# Altium PCB USB-COM V2.PcbDoc
Units mil, origin at the board's own origin, x right, y up, seen from the top; angles counter-clockwise.
Board outline 2345 x 615 mil, 2 copper layers (Top Layer, Bottom Layer); 17 components, 16 nets, 78 pads, 6 vias.
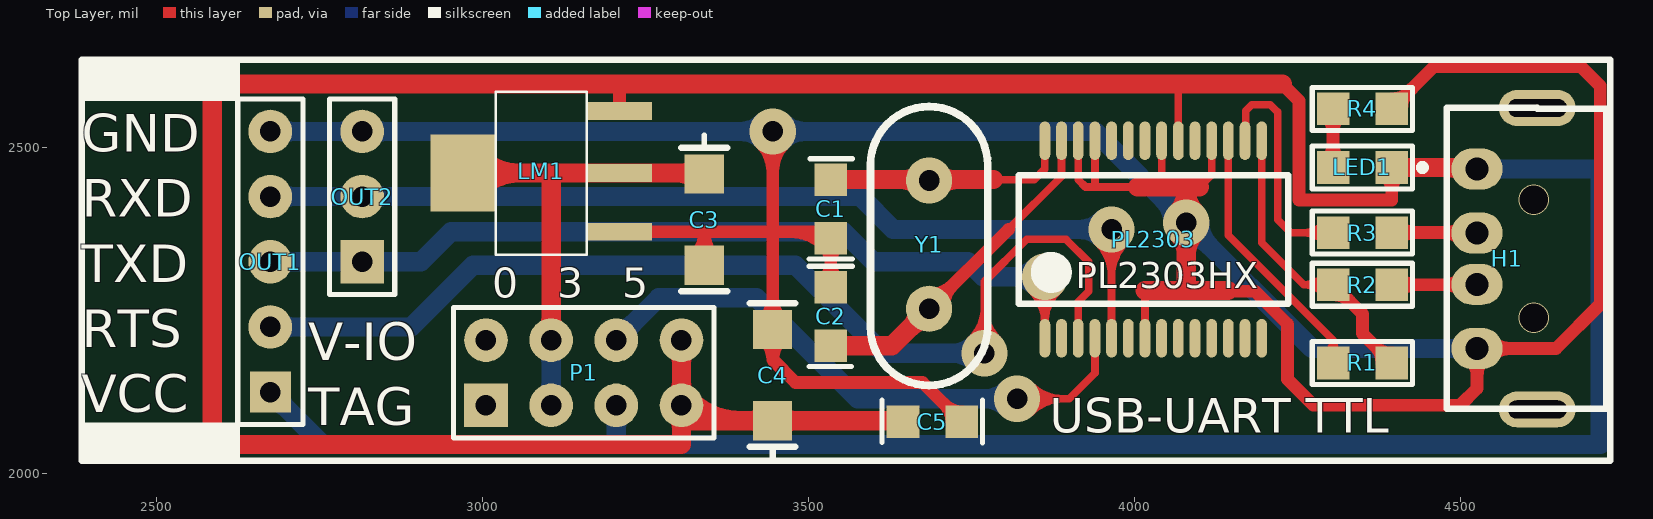
[diagram p0: Top Layer view]
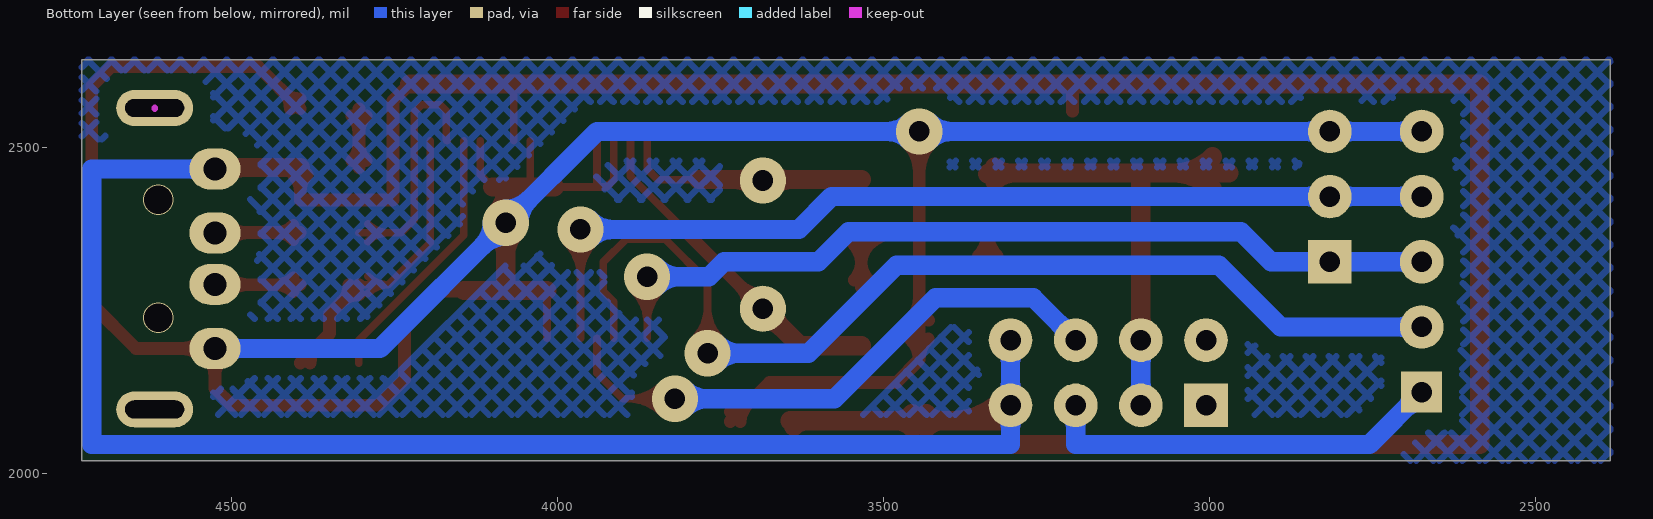
[diagram p1: Bottom Layer view, seen from below]
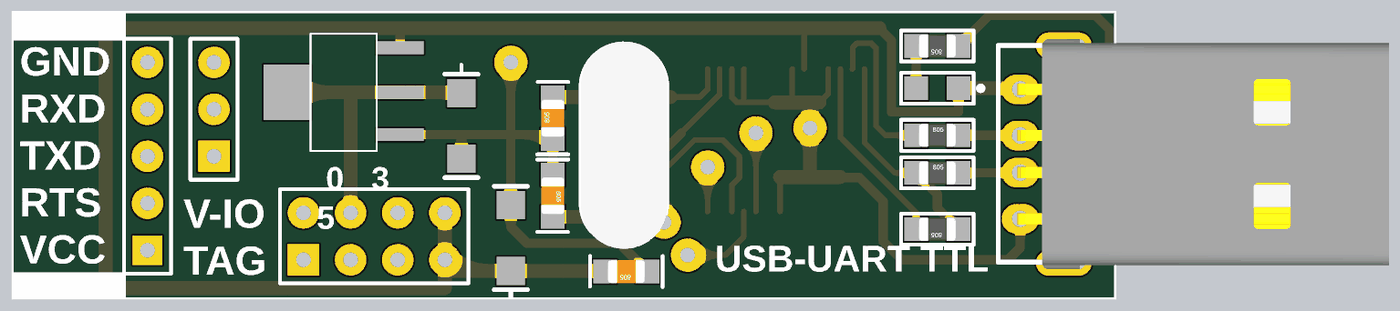
[diagram p2: 3D render of the assembled board from above, using the file's embedded part models]

## Layer stack, top to bottom
Top Layer: signal copper 1.4
Dielectric: dielectric 12.6, FR-4, Dk 4.8
Bottom Layer: signal copper 1.4

## Board outline
2385,2020 2385,2635 4730,2635 4730,2020

## Design rules (kind name [scope] priority, off if disabled: settings)
Clearance Poly [(InPolygon)] p1: gap=25.59
Clearance [All] p2: gap=5
Height [All] p1: minheight=0 maxheight=3000 prefheight=500
PlaneConnect [All] p1: planeconnectstyle=Relief reliefexpansion=20 reliefentries=4 reliefconductorwidth=23.62 reliefairgap=10
PolygonConnect [All] p1: connectstyle=Relief reliefconductorwidth=23.62 reliefentries=4 polygonreliefangle="90 Angle"
RoomDefinition USB-COM [InComponentClass('USB-COM')] p1: confinementstyle=ConfineOut formatcopy=TRUE lockcomponents=FALSE outline 5105,4120 8760,4120 8760,7965 5105,7965
RoutingVias [All] p1: holewidth=31.5 width=70.87 viastyle="Through Hole" minholewidth=28 minwidth=47.24 maxholewidth=125.98 maxwidth=157.48
SilkscreenOverComponentPads [All] p1: minsilkscreentomaskgap=10
SolderMaskExpansion [All] p1: expansion=4
Width [All] p1: maxlimit=78.74 minlimit=11.81 preferedwidth=29.53
25 further rules are at their usual default settings.

## Components (designator, comment, footprint, x,y, rotation, side; value= is the part's Value field where it differs from the comment)
C1 "Capacitor Ceramic" C0805 3534.04,2406.37 r90 top
C2 "Capacitor Ceramic" C0805 3534.04,2241.37 r270 top
C3 "10uF" C1206 3340,2390 r90 top
C4 "10uF" C1206 3444.97,2151.39 r270 top
C5 "Capacitor Ceramic" C0805 3690,2080 r180 top
H1 "USB - A/RA" USB-A-RA 4529.07,2329.99 r90 top
LED1 "LED3" LED0805 4350,2470 r180 top
LM1 "LM1117-3.3V" LM1117-SOP 3159.97,2461.39 r90 top
OUT1 "Header 5" HDR1X5 2674,2125.31 r90 top
OUT2 "Header 3" HDR1X3 2815,2325.31 r90 top
P1 "Header 4X2A" HDR2X4_CEN 3005,2105 r0 top
PL2303 "PL2303HX" PL2303-HX 3113.39,1294.41 r0 top (schematic designator PL1)
R1 "RES_08" "DIEN TRO 0805" 4350,2170 r0 top
R2 "RES_08" "DIEN TRO 0805" 4350,2290 r180 top
R3 "RES_08" "DIEN TRO 0805" 4350,2370 r180 top
R4 "RES_08" "DIEN TRO 0805" 4350,2560 r0 top
Y1 "20MHz" XTAL 3684.97,2349.54 r270 top

## Footprints (in the part's own frame and the unit in brackets; to place one, negate y for a bottom-side part, rotate by r counter-clockwise, add the part's x,y. Pads: shape width x height; smd on the part's side, far side on the other; paste and mask are expansions set on the pad)
C0805 [mil] "Chip Resistor; Body 2.0 x 1.3 mm (LxW typ)"
  rect 50x50 smd: 1(-45,0) 2(45,0)
  silkscreen extent -77,-33 77,33, body extent -39,-25 39,25, height 31
C1206 [mil]
  rect 60x60 smd: 1(-70,0) 2(70,0)
  silkscreen extent -110,-35 110,35
"DIEN TRO 0805" [mil] "Chip Resistor; Body 2.0 x 1.3 mm (LxW typ)"
  rect 50x50 smd: 1(-45,0) 2(45,0)
  silkscreen extent -77,-33 77,33, body extent -39,-25 39,25, height 31
HDR1X3 [mm] "Connector; Header; 3 Position"
  rect 1.7x1.7 hole 0.8: 1(0,0)
  round 1.7 hole 0.8: 2(2.54,0) 3(5.08,0)
  silkscreen extent -1.27,-1.27 6.35,1.27, body extent -1.27,-1.27 6.35,1.27, height 7
HDR1X5 [mm] "Connector; Header; 5 Position"
  rect 1.6x1.6 hole 0.8: 1(0,0)
  round 1.7 hole 0.8: 2(2.54,0) 3(5.08,0) 4(7.62,0) 5(10.16,0)
  silkscreen extent -1.27,-1.27 11.43,1.27, body extent -1.27,-1.27 11.43,1.27, height 7
HDR2X4_CEN [mm] "Connector; Header; 4x2 Position"
  rect 1.7x1.7 hole 0.8: 1(0,0)
  round 1.7 hole 0.8: 2(2.54,0) 3(5.08,0) 4(7.62,0) 5(0,2.54) 6(2.54,2.54) 7(5.08,2.54) 8(7.62,2.54)
  silkscreen extent -1.27,-1.27 8.89,3.81
LED0805 [mil] "Chip Resistor; Body 2.0 x 1.3 mm (LxW typ)"
  rect 50x50 smd: 1(-45,0) 2(45,0)
  silkscreen extent -97,-33 77,33, body extent -60,-25 60,25, height 47
LM1117-SOP [mm]
  rect 0.7x2.54 smd: 1(-2.286,-1.27) 2(0,-1.27) 3(2.413,-1.27)
  rect 3x2.54 smd: 2(0,4.826)
  silkscreen extent -3.18,0 3.17,3.56
PL2303-HX [mil]
  oval 16.53x59.03 smd mask+7.9: 1(749.3,913.5) 2(774.9,913.5) 3(800.48,913.5) 4(826.08,913.5) 5(851.67,913.5) 6(877.27,913.5) 7(902.87,913.5) 8(928.45,913.5) 9(954.05,913.5) 10(979.65,913.5) 11(1005.23,913.5) 12(1030.83,913.5) 13(1056.42,913.5) 14(1082,913.5) 15(1082,1216.68) 16(1056.42,1216.68) 17(1030.83,1216.68) 18(1005.23,1216.68) 19(979.65,1216.68) 20(954.05,1216.68) 21(928.45,1216.68) 22(902.87,1216.68) 23(877.27,1216.68) 24(851.67,1216.68) 25(826.08,1216.68) 26(800.48,1216.68) 27(774.9,1216.68) 28(749.3,1216.68)
  silkscreen extent 709,967 1123,1164
USB-A-RA [mm] "USB Type A"
  oval 1.6x2 hole 0.9: 1(3.5,0.08) 2(1,0.08) 3(-1,0.08) 4(-3.5,0.08)
  oval 1.4x3 hole 0.7 slot 2.3 at 90 deg: HOLE(-5.875,-2.27) HOLE(5.875,-2.27)
  round 1.2 hole 1.1: HOLE(-2.3,-2.13) HOLE(2.3,-2.13)
  Keep-Out Layer lines w0.254: 5.842,-2.27 5.875,-2.27
  silkscreen extent -5.84,-4.95 5.87,1.27, body extent -6.25,-19.8 6.25,0.23, height 2.18
XTAL [mm]
  round 1.8 hole 0.8: 1(-2.552,0.001) 2(2.448,0.001)
  silkscreen extent -5.44,-2.29 5.44,2.29, body extent -5.55,-2.32 5.62,2.35, height 3.63

## Part data
C1 C2 C5: library part CapSMD, "Capacitor"
C3 C4: library part "Cap SMD 1206"
LED1: library part "LED 3mm", "LED 3mm"
LM1: library part LM1117, "800mA Low-Dropout Linear Regulator"
OUT1: "Header, 5-Pin"
OUT2: "Header, 3-Pin"
P1: "Header, 4-Pin, Dual row"
PL2303: "PL-2303 USB to RS-232 Bridge Controller"
Y1: library part XTAL, "Crystal Oscillator"

## Via types
v1: diameter 70.87, hole 31.5, Top Layer to Bottom Layer, 6 vias

## Nets (pads, with @x,y where several pads share a name; then routed paths per layer and width w, separated by ;. In a path a pad name is that pad's centre, name@x,y a point inside that pad or via, vN(x,y) a via of type N, cw(c..) or ccw(c..) an arc to the next point about the centre after c; other vN are vias at no path point)
D+: H1.3 R2.1 | length 255.8
  Top Layer w19.68: R2.1 4525.3,2290 H1.3 ; R2.1@4405.72,2279.28 cw(c4431.59,2253.41) 4431.59,2290 cw(c4431.59,2326.59) R2.1@4405.72,2300.72 ; 4473.78,2290 ccw(c4473.78,2334.88) H1.3@4505.51,2303.14 ; 4476.76,2290 cw(c4476.76,2249.34) H1.3@4505.51,2278.09
D-: H1.2 R3.1 | length 255.8
  Top Layer w19.68: R3.1 4525.27,2370 H1.2 ; R3.1@4405.72,2359.28 cw(c4431.59,2333.41) 4431.59,2370 cw(c4431.59,2406.59) R3.1@4405.72,2380.72 ; 4473.72,2370 cw(c4473.72,2325.03) H1.2@4505.51,2356.83 ; 4476.82,2370 ccw(c4476.82,2410.58) H1.2@4505.51,2381.88
DM: PL2303.16 R3.2 | length 434.8
  Top Layer w11.81: PL2303.16 4170.8,2512.07 4170.8,2557.06 4180,2566.26 4208.74,2566.26 4220.01,2554.99 4220.01,2474.32 4220,2390 4240,2370 R3.2 ; R3.2@4291.5,2356.5 ccw(c4258.9,2323.9) 4258.9,2370 ccw(c4258.9,2416.1) R3.2@4291.5,2383.5
DP: PL2303.15 R1.2 R2.2 | length 634.9
  Top Layer w11.81: PL2303.15 4195.4,2354.6 4260,2290 ; R2.2@4291.27,2276.73 ccw(c4260,2246.53) 4260,2290 ; R2.2@4291.27,2303.27 cw(c4260,2333.47) 4260,2290 ; R2.2 4260,2290
  Top Layer w19.68: R2.2@4305,2274.84 cw(c4305,2238.25) 4330.88,2264.12 cw(c4356.75,2290) R2.2@4320.16,2290 ; R2.2 4350,2245 4350,2215 R1.2 ; R1.2@4379.84,2170 ccw(c4343.25,2170) 4369.12,2195.88 ccw(c4395,2221.75) R1.2@4395,2185.16
GND: C1.1 C2.1 C3.1 C4.1 C5.1 H1.4 LM1.1 OUT1.5 OUT2.3 PL2303.7 PL2303.18 PL2303.21 PL2303.25 PL2303.26 R4.2 | length 6868.1
  Top Layer w11.81: PL2303.26 3913.87,2451.13 3925,2440 3940,2440 ; PL2303.25 3939.47,2440.53 3940,2440 ; 4005,2440 3940,2440 ; PL2303.7 4016.26,2281.26 ; 4041.84,2441.84 PL2303.21 ; 4075,2440 4079.73,2440 ; 4100,2440 4118.62,2458.62 PL2303.18
  Top Layer w19.68: LM1.1 3340,2371.39 ; C3.1@3325.75,2334.25 ccw(c3291.34,2368.66) 3340,2368.66 ccw(c3388.66,2368.66) C3.1@3354.25,2334.25 ; C3.1 3340,2371.39 ; v1@3426.9,2507.22 cw(c3383.22,2463.53) 3445,2463.53 cw(c3506.78,2463.53) v1@3463.1,2507.22 ; C4.1@3430.72,2235.64 ccw(c3396.31,2270.05) 3444.97,2270.05 ccw(c3493.64,2270.05) C4.1@3459.22,2235.64 ; C4.1@3431.22,2206.64 cw(c3401.75,2175.03) 3444.97,2175.03 ; 3444.97,2371.36 C4.1 3444.97,2175.03 ; v1(3445,2525.31) 3445,2371.39 ; C4.1@3458.72,2206.64 ccw(c3488.19,2175.03) 3444.97,2175.03 ; 3473.27,2371.39 cw(c3473.27,2300.61) 3523.32,2350.66 cw(c3497.44,2324.78) 3534.04,2324.78 cw(c3570.63,2324.78) C1.1@3544.75,2350.66 ; C2.1@3523.32,2297.09 ccw(c3497.44,2322.97) 3534.04,2322.97 ccw(c3570.63,2322.97) C2.1@3544.75,2297.09 ; C2.1 C1.1 3524.02,2371.39 3445,2371.39 ; C5.1@3719.84,2080 ccw(c3683.25,2080) 3709.12,2105.88 ccw(c3735,2131.75) C5.1@3735,2095.16 ; C5.1 3675,2140 3480,2140 3444.97,2175.03 ; 4145,2280 4185,2280 4235,2230 4235,2145 4275,2105 4500,2105 4525.92,2130.92 H1.4 4647.19,2192.19 4715,2260 4715,2595 4685,2625 4460,2625 R4.2 ; R4.2@4395,2575.16 ccw(c4395,2611.75) 4420.88,2585.88 ccw(c4446.75,2560) R4.2@4410.16,2560 ; H1.4@4513.39,2179.66 cw(c4483.14,2149.42) 4525.92,2149.42 cw(c4568.69,2149.42) H1.4@4538.44,2179.66 ; H1.4@4546.32,2179.66 cw(c4576.56,2149.42) 4576.56,2192.19 cw(c4576.56,2234.96) H1.4@4546.32,2204.72 ; 3340,2371.39 3445,2371.39
  Top Layer w29.53: 4005,2440 4075,2440 ; 4016.26,2281.26 4143.74,2281.26 ; v1@4065.12,2370.65 cw(c4029.83,2335.37) 4079.73,2335.37 cw(c4129.63,2335.37) v1@4094.35,2370.65 ; v1@4065.12,2399.88 ccw(c4029.83,2435.17) 4079.73,2435.17 ccw(c4129.63,2435.17) v1@4094.35,2399.88 ; 4079.73,2281.26 v1(4079.73,2385.27) 4079.73,2440 4100,2440
  Bottom Layer w29.53: OUT1.5 v1(3445,2525.31) 3939.69,2525.31 v1(4079.73,2385.27) 4272.81,2192.19 H1.4 ; OUT1.5@2684.44,2514.87 cw(c2709.64,2489.67) 2709.64,2525.31 cw(c2709.64,2560.96) OUT1.5@2684.44,2535.75 ; OUT2.3@2804.56,2514.87 ccw(c2779.36,2489.67) 2779.36,2525.31 ccw(c2779.36,2560.96) OUT2.3@2804.56,2535.75 ; OUT2.3@2825.44,2514.87 cw(c2850.64,2489.67) 2850.64,2525.31 cw(c2850.64,2560.96) OUT2.3@2825.44,2535.75 ; v1@3430.38,2510.7 ccw(c3395.1,2475.41) 3395.1,2525.31 ccw(c3395.1,2575.21) v1@3430.38,2539.93 ; v1@3459.62,2510.7 cw(c3494.9,2475.41) 3494.9,2525.31 cw(c3494.9,2575.21) v1@3459.62,2539.93 ; v1@4059.06,2385.27 ccw(c4009.16,2385.27) 4044.45,2420.55 ccw(c4079.73,2455.84) v1@4079.73,2405.94 ; v1@4079.73,2364.6 cw(c4079.73,2314.7) 4115.02,2349.98 cw(c4150.3,2385.27) v1@4100.4,2385.27 ; H1.4@4508.99,2183.14 ccw(c4487.15,2161.3) 4487.15,2192.19 ccw(c4487.15,2223.08) H1.4@4508.99,2201.24
NetLED1_2: LED1.2 R4.1 | length 205
  Top Layer w19.68: LED1.2@4294.28,2480.72 ccw(c4268.41,2506.59) 4305,2506.59 ccw(c4341.59,2506.59) LED1.2@4315.72,2480.72 ; R4.1@4294.28,2549.28 cw(c4268.41,2523.41) 4305,2523.41 cw(c4341.59,2523.41) R4.1@4315.72,2549.28 ; LED1.2 R4.1
NetPL1_17: PL2303.17 R1.1 | length 452.7
  Top Layer w11.81: PL2303.17 4144.22,2365.78 4305,2205 ; R1.1@4294.67,2186.06 ccw(c4282.47,2205) 4305,2205 ; R1.1 4305,2205 ; R1.1@4315.33,2186.06 cw(c4327.53,2205) 4305,2205
OSC1: C2.2 PL2303.27 Y1.2 | length 662.2
  Top Layer w11.81: 3806.85,2375 3888.29,2456.44 PL2303.27
  Top Layer w19.68: Y1.2 3806.85,2375 ; Y1.2@3685,2274.8 ccw(c3685,2327.08) 3721.96,2290.11 ccw(c3758.93,2253.15) Y1.2@3706.65,2253.15
  Top Layer w29.53: C2.2 3628.23,2196.37 Y1.2 ; Y1.2@3668.27,2253.15 cw(c3627.87,2253.15) 3656.44,2224.59 cw(c3685,2196.02) Y1.2@3685,2236.42
OSC2: C1.2 PL2303.28 Y1.1 | length 505.7
  Top Layer w11.81: 3783.63,2451.37 3846.37,2451.37 3862.69,2467.69 PL2303.28
  Top Layer w29.53: C1.2 3783.63,2451.37 ; 3641.29,2451.37 cw(c3641.29,2406.29) Y1.1@3673.17,2438.17 ; 3647.92,2451.37 ccw(c3647.92,2487.08) Y1.1@3673.17,2461.83 ; Y1.1@3696.83,2438.17 cw(c3728.71,2406.29) 3728.71,2451.37 ; Y1.1@3696.83,2461.83 ccw(c3722.08,2487.08) 3722.08,2451.37
RTS: OUT1.2 PL2303.3 | length 1939.9
  Top Layer w11.81: v1@3749.12,2205.88 ccw(c3698.71,2256.29) 3770,2256.29 ccw(c3841.29,2256.29) v1@3790.88,2205.88 ; v1@3757.47,2197.53 ccw(c3727.23,2227.77) 3770,2227.77 ccw(c3812.77,2227.77) v1@3782.53,2197.53 ; v1(3770,2185) 3770,2295 3835,2360 3895,2360 3930,2325 3930,2280 3913.87,2263.87 PL2303.3
  Bottom Layer w29.53: OUT1.2 2890.31,2225.31 2985,2320 3480,2320 3615,2185 v1(3770,2185) ; OUT1.2@2684.44,2214.87 cw(c2709.64,2189.67) 2709.64,2225.31 cw(c2709.64,2260.96) OUT1.2@2684.44,2235.75 ; v1@3755.38,2170.38 ccw(c3720.1,2135.1) 3720.1,2185 ccw(c3720.1,2234.9) v1@3755.38,2199.62
RX: OUT1.4 OUT2.2 PL2303.5 | length 1904.5
  Top Layer w11.81: v1@3944.18,2354.12 cw(c3893.77,2303.71) 3965.06,2303.71 cw(c4036.34,2303.71) v1@3985.94,2354.12 ; v1@3952.53,2362.47 cw(c3922.29,2332.23) 3965.06,2332.23 cw(c4007.83,2332.23) v1@3977.58,2362.47 ; PL2303.5 v1(3965.06,2375)
  Bottom Layer w29.53: OUT1.4 3579.69,2425.31 3630,2375 v1(3965.06,2375) ; OUT1.4@2684.44,2414.87 cw(c2709.64,2389.67) 2709.64,2425.31 cw(c2709.64,2460.96) OUT1.4@2684.44,2435.75 ; OUT2.2@2804.56,2414.87 ccw(c2779.36,2389.67) 2779.36,2425.31 ccw(c2779.36,2460.96) OUT2.2@2804.56,2435.75 ; OUT2.2@2825.44,2414.87 cw(c2850.64,2389.67) 2850.64,2425.31 cw(c2850.64,2460.96) OUT2.2@2825.44,2435.75 ; v1@3950.44,2360.38 ccw(c3915.16,2325.1) 3915.16,2375 ccw(c3915.16,2424.9) v1@3950.44,2389.62
TX: OUT1.3 OUT2.1 PL2303.1 | length 1756.3
  Top Layer w11.81: v1@3841.81,2281.43 cw(c3791.4,2231.02) 3862.69,2231.02 cw(c3933.98,2231.02) v1@3883.57,2281.43 ; v1@3850.16,2289.78 cw(c3819.92,2259.54) 3862.69,2259.54 cw(c3905.46,2259.54) v1@3875.22,2289.78 ; PL2303.1 v1(3862.69,2302.31)
  Bottom Layer w29.53: OUT1.3 2905.31,2325.31 2951.39,2371.39 3553.61,2371.39 3599.69,2325.31 3744.69,2325.31 3767.69,2302.31 v1(3862.69,2302.31) ; OUT1.3@2684.44,2314.87 cw(c2709.64,2289.67) 2709.64,2325.31 cw(c2709.64,2360.96) OUT1.3@2684.44,2335.75 ; OUT2.1@2804.56,2314.87 ccw(c2779.36,2289.67) 2779.36,2325.31 ccw(c2779.36,2360.96) OUT2.1@2804.56,2335.75 ; OUT2.1@2825.44,2314.87 cw(c2850.64,2289.67) 2850.64,2325.31 cw(c2850.64,2360.96) OUT2.1@2825.44,2335.75 ; v1@3848.07,2287.69 ccw(c3812.79,2252.41) 3812.79,2302.31 ccw(c3812.79,2352.21) v1@3848.07,2316.93
V33: C3.2 LM1.2 P1.2 P1.6 | length 1087.7
  Top Layer w19.68: C3.2@3338.61,2461.39 C3.2@3339.97,2461.39
  Top Layer w29.53: LM1.2@2969.97,2461.39 3105,2461.39 ; LM1.2@2994.89,2436.47 cw(c3055.04,2376.32) 3055.04,2461.39 cw(c3055.04,2546.45) LM1.2@2994.89,2486.3 ; P1.6@3094.56,2215.44 ccw(c3069.36,2240.64) 3105,2240.64 ccw(c3140.64,2240.64) P1.6@3115.44,2215.44 ; P1.6 3105,2461.39 ; 3299.87,2461.39 cw(c3299.87,2419.87) C3.2@3329.23,2449.23 ; 3306.57,2461.39 ccw(c3306.57,2493.43) C3.2@3329.23,2470.77 ; C3.2 3338.61,2461.39 3209.97,2461.39 3105,2461.39
  Bottom Layer w29.53: P1.2@3094.56,2115.44 ccw(c3069.36,2140.64) 3105,2140.64 ccw(c3140.64,2140.64) P1.2@3115.44,2115.44 ; P1.6@3094.56,2194.56 cw(c3069.36,2169.36) 3105,2169.36 cw(c3140.64,2169.36) P1.6@3115.44,2194.56 ; P1.2 P1.6
VCC: C4.2 C5.2 H1.1 LED1.1 LM1.3 P1.4 P1.8 PL2303.20 | length 7000.6
  Top Layer w11.81: 4066.23,2598.04 4067.45,2596.82 PL2303.20@4067.45,2511.09
  Top Layer w19.68: LM1.3 3209.97,2598.04 ; C5.2@3643.61,2081.39 C5.2 ; 4226.96,2598.04 4252.48,2572.52 4252.48,2420 4395,2420 LED1.1 ; LED1.1@4384.28,2459.28 cw(c4358.41,2433.41) 4395,2433.41 cw(c4431.59,2433.41) LED1.1@4405.72,2459.28 ; H1.1@4523.7,2470 H1.1
  Top Layer w29.53: P1.4@3294.56,2115.44 ccw(c3269.36,2140.64) 3305,2140.64 ccw(c3340.64,2140.64) 3315.44,2115.44 ccw(c3397.65,2197.65) 3397.65,2081.39 ; P1.8@3294.56,2194.56 cw(c3269.36,2169.36) 3305,2169.36 cw(c3340.64,2169.36) P1.8@3315.44,2194.56 ; P1.8 P1.4 ; P1.4@3315.44,2094.56 ccw(c3340.64,2069.36) 3305,2069.36 ccw(c3269.36,2069.36) 3294.56,2094.56 ccw(c3326.36,2126.36) P1.4@3326.36,2081.39 ; C4.2@3434.2,2070.61 ccw(c3408.19,2044.6) 3408.19,2081.39 ccw(c3408.19,2118.17) C4.2@3434.2,2092.16 ; C4.2@3455.74,2070.61 cw(c3481.75,2044.6) 3481.75,2081.39 cw(c3481.75,2118.17) C4.2@3455.74,2092.16 ; 3616.94,2081.39 cw(c3616.94,2051.94) C5.2@3637.76,2072.76 ; C5.2@3643.61,2081.39 C4.2 3305,2081.39 P1.4 ; 4226.96,2598.04 4066.23,2598.04 2585,2598.04 2585,2045 3305,2045 P1.4 ; LED1.1 H1.1@4523.7,2470 ; 4481.8,2470 cw(c4481.8,2431.54) H1.1@4508.99,2458.73
  Bottom Layer w29.53: P1.4@3294.56,2094.56 cw(c3269.36,2069.36) 3305,2069.36 cw(c3340.64,2069.36) P1.4@3315.44,2094.56 ; P1.4@3294.56,2115.44 ccw(c3269.36,2140.64) 3305,2140.64 ccw(c3340.64,2140.64) P1.4@3315.44,2115.44 ; P1.8@3294.56,2194.56 cw(c3269.36,2169.36) 3305,2169.36 cw(c3340.64,2169.36) P1.8@3315.44,2194.56 ; P1.8 P1.4 3305,2045 4715,2045 4715,2467.78 H1.1 ; H1.1@4542.84,2458.73 cw(c4564.68,2436.89) 4564.68,2467.78 cw(c4564.68,2498.67) H1.1@4542.84,2476.83
VCCIO: P1.7 PL2303.4 | length 1208.9
  Top Layer w11.81: v1(3820,2115) 3900,2115 3939.47,2154.47 PL2303.4 ; v1@3832.53,2102.47 cw(c3862.77,2072.23) 3862.77,2115 cw(c3862.77,2157.77) v1@3832.53,2127.53 ; v1@3840.88,2094.12 cw(c3891.29,2043.71) 3891.29,2115 cw(c3891.29,2186.29) v1@3840.88,2135.88
  Bottom Layer w29.53: P1.7 3270,2270 3420,2270 3575,2115 v1(3820,2115) ; P1.7@3205,2219.76 ccw(c3205,2255.41) 3230.2,2230.2 ccw(c3255.41,2205) P1.7@3219.76,2205 ; v1@3805.38,2100.38 ccw(c3770.1,2065.1) 3770.1,2115 ccw(c3770.1,2164.9) v1@3805.38,2129.62
VTAG: OUT1.1 P1.3 | length 736.2
  Bottom Layer w29.53: OUT1.1@2674,2110.55 cw(c2674,2074.91) 2699.2,2100.11 cw(c2724.41,2125.31) OUT1.1@2688.76,2125.31 ; OUT1.1 2754.31,2045 3205,2045 P1.3 ; P1.3@3194.56,2094.56 cw(c3169.36,2069.36) 3205,2069.36 cw(c3240.64,2069.36) P1.3@3215.44,2094.56
pads on no net: H1.HOLE P1.1 P1.5 PL2303.2 PL2303.6 PL2303.8 PL2303.9 PL2303.10 PL2303.11 PL2303.12 PL2303.13 PL2303.14 PL2303.19 PL2303.22 PL2303.23 PL2303.24

## Polygon pours and split planes (outlines as drawn)
no net on Bottom Layer "Bottom Layer-No Net" (hatched 45Degree grid 25 track 10, pour order 2): 2385,2635 2385,2020 4730,2020 4730,2635

## Silkscreen, mask and mechanical layers (free items; w line width, h text height)
Top Overlay:
  rectangle: 2385,2572.32 2627.7,2635
  rectangle: 2385,2015.63 2627.7,2078.31
  lines w8: 3340,2500 3340,2520
  lines w10: 3445,2020 3445,2041.39 ; 2385,2020 2385,2635 4730,2635 4730,2020 2385,2020
  text "GND" at 2385,2475 h98.43
  text "RXD" at 2385,2375 h98.43
  text "TXD" at 2385,2275 h98.43
  text "0   3   5" at 3015,2255 h78.74
  text "RTS" at 2385,2175 h98.43
  text "V-IO" at 2732.28,2155 h98.43
  text "VCC" at 2385,2075 h98.43
  text "TAG" at 2732.28,2055 h98.43
  text "USB-UART TTL" at 3870,2045 h90